# EAGLE board illumi-leddriver (EAGLE 6.2)
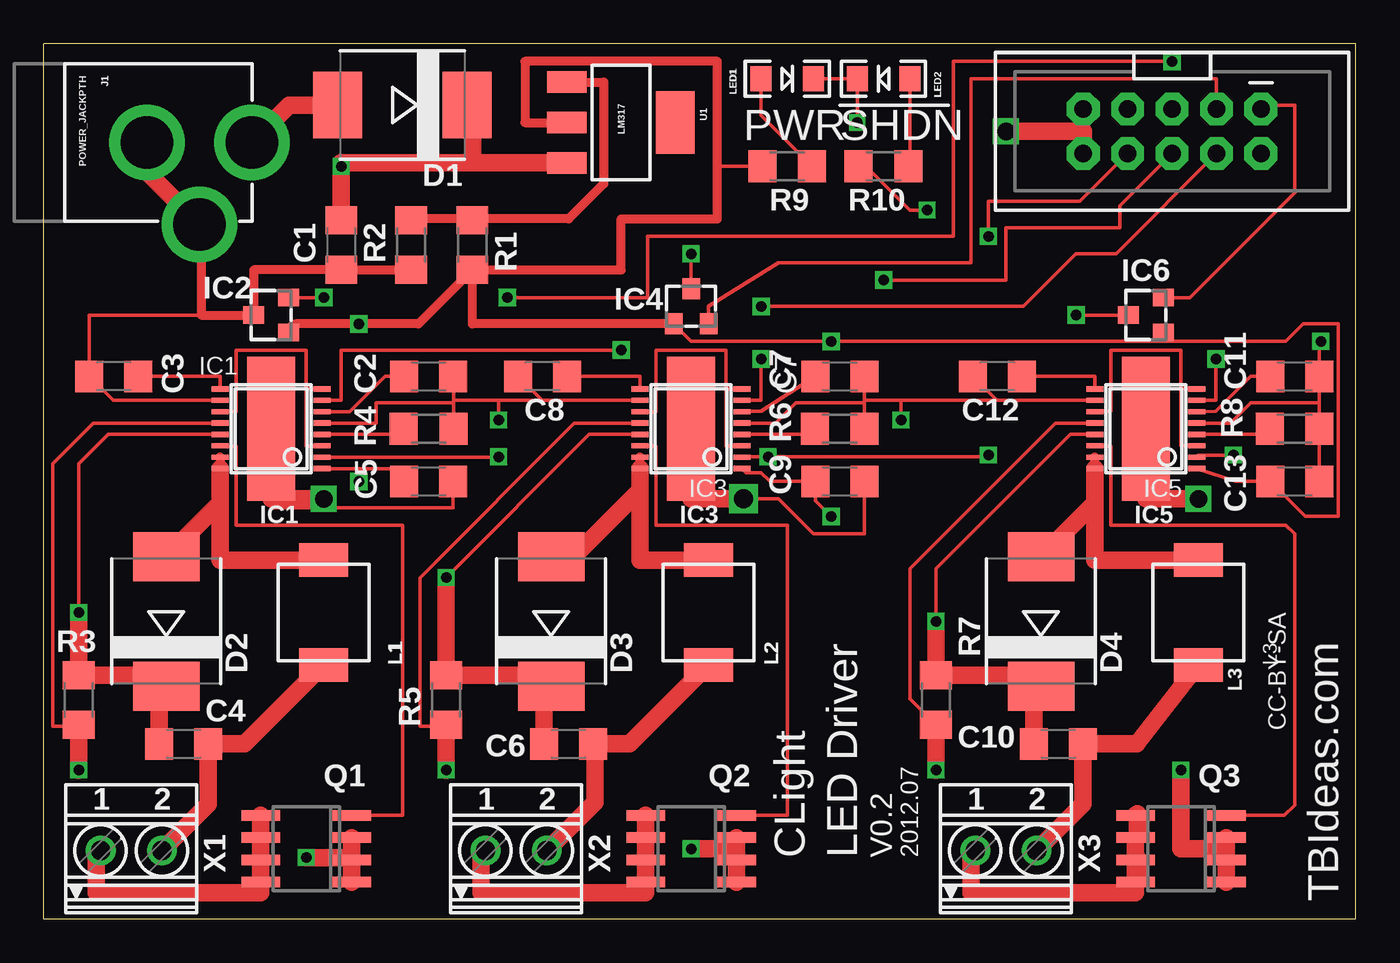
[diagram p0: board, top side]
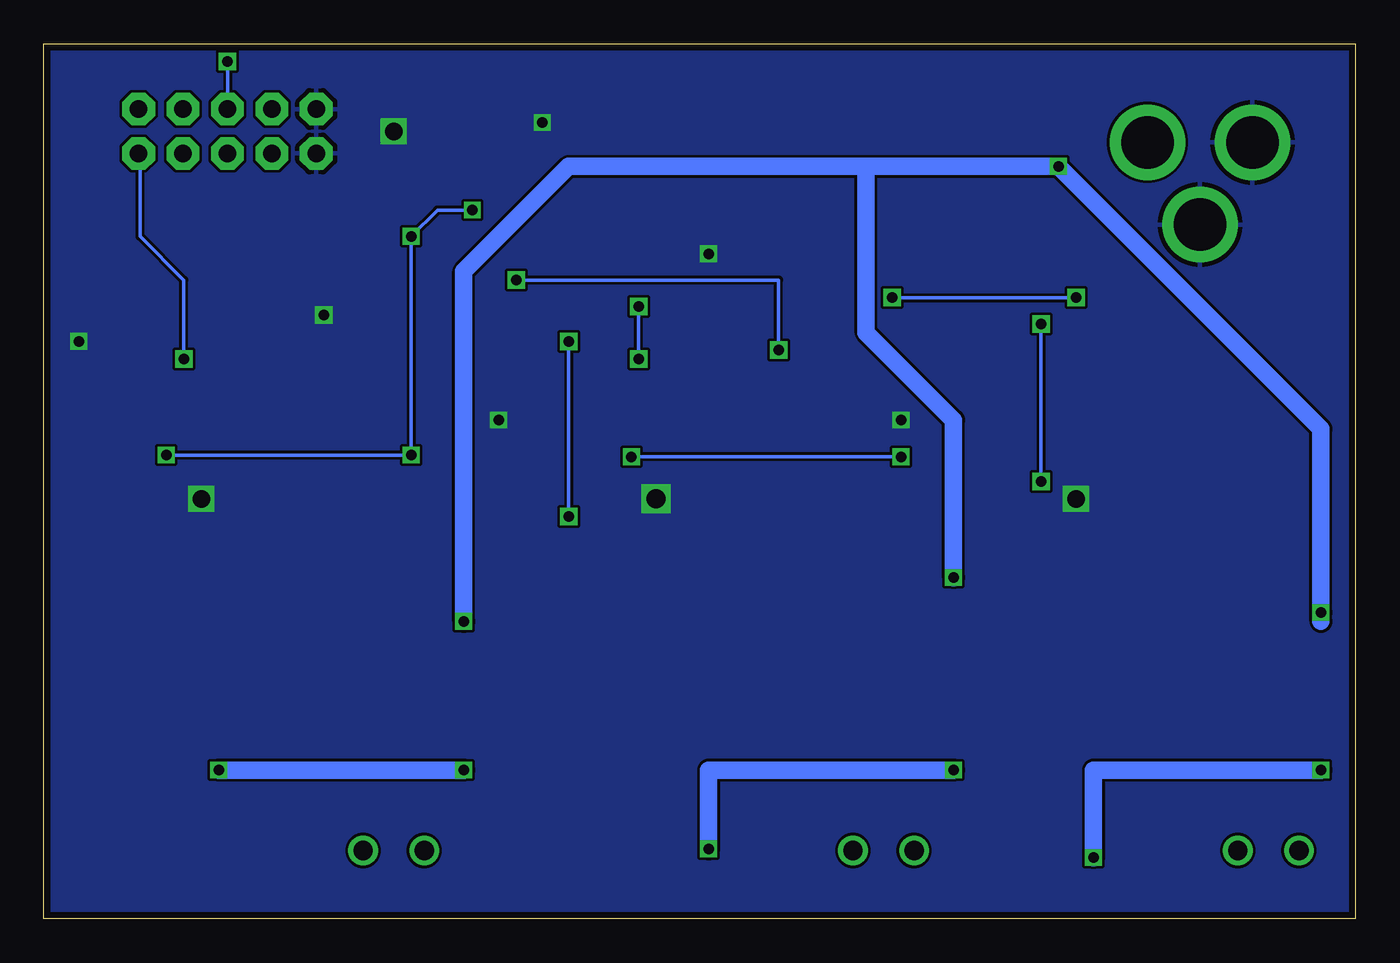
[diagram p1: board, bottom side, seen from below]

Size 75 x 50 mm. Coordinates in mm from the lower left corner, seen from the top.
Outline: 0,0 75,0 75,50 0,50 0,0
Copper layers (1*16): Top 0.0356mm / dielectric 1.5011mm / Bottom 0.0356mm
Design rules: minimum track width 6mil, minimum drill 13mil, track to track 6mil, track to pad 6mil, pad to pad 6mil, via to via 6mil, smd to smd 6mil, copper to edge 15mil, drill to drill 6mil, minimum pad ring 7mil, minimum via ring 7mil, stop-mask expansion 4mil, vias tented up to drill 0mil, thermal gap 10mil

## Footprints (pad centres in the part's own frame; a part is rotated, then mirrored left to right if it is on the bottom)
C1206 = smd 1.6 x 1.8: 1 -1.4,0; 2 1.4,0
SMC = smd 2.8 x 3.8: A 3.7,0; C -3.7,0
TSSOP16-EXPOSED_PAD_LARGE = smd 0.305 x 0.991: 1 -2.275,-2.918; 2 -1.625,-2.918; 3 -0.975,-2.918; 4 -0.325,-2.918; 5 0.325,-2.918; 6 0.975,-2.918; 7 1.625,-2.918; 8 2.275,-2.918; 9 2.275,2.918; 10 1.625,2.918; 11 0.975,2.918; 12 0.325,2.918; 13 -0.325,2.918; 14 -0.975,2.918; 15 -1.625,2.918; 16 -2.275,2.918 | smd 8.22 x 2.74: GND 0,0
SOT-23B = smd 1 x 1.2: 1 -1,-1; 2 1,-1; 3 0,1
POWER_JACK_PTH = drill 2.997 pad 4.318: GND 0,7.7; GNDBREAK 4.7,10.7; PWR 0,13.7
2X5-SHROUDED = drill 1.016 pad 1.88 octagon: 1 -1.27,5.08; 2 1.27,5.08; 3 -1.27,2.54; 4 1.27,2.54; 5 -1.27,0; 6 1.27,0; 7 -1.27,-2.54; 8 1.27,-2.54; 9 -1.27,-5.08; 10 1.27,-5.08
L2020 = smd 1.915 x 2.79: P$1 2.995,0; P$2 -2.995,0
LED-1206 = smd 1.2 x 1.4: A -1.5,0; C 1.5,0
SO-08 = smd 0.6 x 2.2: 1 -1.905,-2.6; 2 -0.635,-2.6; 3 0.635,-2.6; 4 1.905,-2.6; 5 1.905,2.6; 6 0.635,2.6; 7 -0.635,2.6; 8 -1.905,2.6
R1206 = smd 1.6 x 1.803: 1 -1.422,0; 2 1.422,0
SOT223 = smd 1.219 x 2.235: 1 -2.311,-3.099; 2 0,-3.099; 3 2.311,-3.099 | smd 3.6 x 2.2: 4 0,3.099
1751248 = drill 1.1 pad 1.7: 1 -1.75,-0.1; 2 1.75,-0.1

## Placement (x,y rotation side)
C1  0.1uF  [C1206]  17,38.5 270 top
C2  0.1uF  [C1206]  22,31 0 top
C3  0.1uF  [C1206]  4,31 180 top
C4  10uF  [C1206]  8,10 0 top
C5  2.2uF  [C1206]  22,25 0 top
C6  10uF  [C1206]  30,10 0 top
C7  0.1uF  [C1206]  45.5,31 0 top
C8  0.1uF  [C1206]  28.5,31 180 top
C9  2.2uF  [C1206]  45.5,25 0 top
C10  10uF  [C1206]  58,10 0 top
C11  0.1uF  [C1206]  71.5,31 0 top
C12  0.1uF  [C1206]  54.5,31 180 top
C13  2.2uF  [C1206]  71.5,25 0 top
D1  50V-8A  [SMC]  20.5,46.5 180 top
D2  MBRS360T3  [SMC]  7,17 90 top
D3  MBRS360T3  [SMC]  29,17 90 top
D4  MBRS360T3  [SMC]  57,17 90 top
IC1  LT3518TSSOP16-EXPOSED-PAD-LARGE  [TSSOP16-EXPOSED_PAD_LARGE]  13,28 90 top
IC2  TC1047  [SOT-23B]  13,34.5 90 top
IC3  LT3518TSSOP16-EXPOSED-PAD-LARGE  [TSSOP16-EXPOSED_PAD_LARGE]  37,28 90 top
IC4  TC1047  [SOT-23B]  37,35 0 top
IC5  LT3518TSSOP16-EXPOSED-PAD-LARGE  [TSSOP16-EXPOSED_PAD_LARGE]  63,28 90 top
IC6  TC1047  [SOT-23B]  63,34.5 90 top
J1  POWER_JACKPTH  [POWER_JACK_PTH]  -1.79,44.37 270 top
JP1  M05X2SHD  [2X5-SHROUDED]  64.5,45 270 top
L1  15uH  [L2020]  16,17.5 90 top
L2  15uH  [L2020]  38,17.5 90 top
L3  15uH  [L2020]  66,17.5 90 top
LED1  Green  [LED-1206]  42.5,48 0 top
LED2  red  [LED-1206]  48,48 180 top
Q1  FDS4685  [SO-08]  15,4 90 top
Q2  FDS4685  [SO-08]  37,4 90 top
Q3  FDS4685  [SO-08]  65,4 90 top
R1  240  [R1206]  24.5,38.5 270 top
R2  390  [R1206]  21,38.5 90 top
R3  143mO  [R1206]  2,12.5 270 top
R4  16.9kO  [R1206]  22,28 180 top
R5  143mO  [R1206]  23,12.5 270 top
R6  16.9kO  [R1206]  45.5,28 180 top
R7  143mO  [R1206]  51,12.5 270 top
R8  16.9kO  [R1206]  71.5,28 180 top
R9  220  [R1206]  42.5,43 180 top
R10  220  [R1206]  48,43 180 top
U1  LM317  [SOT223]  33,45.5 270 top
X1  1751248  [1751248]  5,4 0 top
X2  1751248  [1751248]  27,4 0 top
X3  1751248  [1751248]  55,4 0 top

## Library data of the parts
C1-C13 R1-R10 = rcl
D1-D4 = diode
IC1 IC3 IC5 = lt3518
IC2 IC4 IC6 = tc1047
J1 JP1 LED1 LED2 U1 = SparkFun
L1-L3 = l2020
Q1-Q3 = transistor-power
X1-X3 = con-phoenix-350; OC_FARNELL: unknown; OC_NEWARK: unknown

## Nets
3.3V: C5.1 C9.1 C13.1 IC1.1 IC2.1 IC3.1 IC4.1 IC5.1 IC6.1 R1.2 R9.2 U1.2
BLUEPWM: IC5.7 JP1.2
BLUETEMP: IC6.2 JP1.1
GND: C1.2 C2.2 C3.2 C5.2 C7.2 C8.2 C9.2 C11.2 C12.2 C13.2 IC1.5 IC1.10 IC1.GND IC2.3 IC3.5 IC3.10 IC3.GND IC4.3 IC5.5 IC5.10 IC5.GND IC6.3 J1.GND J1.GNDBREAK JP1.9 JP1.10 LED1.C LED2.C R2.1 R4.1 R6.1 R8.1
GREENPWM: IC3.7 JP1.4
GREENTEMP: IC4.2 JP1.3
N$1: IC1.3 IC1.8 IC1.11
N$2: IC3.3 IC3.8 IC3.11
N$3: R1.1 R2.2 U1.1
N$4: IC3.12 Q2.1 Q2.2 Q2.3 R5.2
N$5: IC1.12 Q1.1 Q1.2 Q1.3 R3.2
N$6: IC1.14 Q1.4
N$7: Q1.5 Q1.6 Q1.7 Q1.8 X1.1
N$8: C4.2 L1.P$2 X1.2
N$9: D2.A IC1.15 IC1.16 L1.P$1
N$10: IC3.14 Q2.4
N$11: IC1.4 R4.2
N$12: Q2.5 Q2.6 Q2.7 Q2.8 X2.1
N$13: C6.2 L2.P$2 X2.2
N$14: D3.A IC3.15 IC3.16 L2.P$1
N$15: C2.1 IC1.6
N$16: C3.1 IC1.9
N$17: IC3.4 R6.2
N$18: C7.1 IC3.6
N$19: C8.1 IC3.9
N$20: IC5.3 IC5.8 IC5.11
N$21: IC5.12 Q3.1 Q3.2 Q3.3 R7.2
N$22: IC5.14 Q3.4
N$23: Q3.5 Q3.6 Q3.7 Q3.8 X3.1
N$24: C10.2 L3.P$2 X3.2
N$25: D4.A IC5.15 IC5.16 L3.P$1
N$26: IC5.4 R8.2
N$27: C11.1 IC5.6
N$28: C12.1 IC5.9
N$29: D1.A J1.PWR
N$31: LED1.A R9.1
N$34: LED2.A R10.1
REDPWM: IC1.7 JP1.6
REDTEMP: IC2.2 JP1.5
SHDN: IC1.2 IC3.2 IC5.2 JP1.8 R10.2
VIN: C1.1 C4.1 C6.1 C10.1 D1.C D2.C D3.C D4.C IC1.13 IC3.13 IC5.13 R3.1 R5.1 R7.1 U1.3

## Tracks (layer width: path | path; a pad name or v marks a point on that pad's centre or on a via)
3.3V  (via drill 0.6 pad 1)
  Top 0.2: C5.1 19.88,25.73 18,25.73 | 18,25.73 IC1.1 | IC3.1 40.14,25.5 41,25.5 41.5,25 C9.1 44.1,23.9 v45,23 | IC6.1 63.5,33 | 63.5,33 v45,33 37,33 IC4.1 | IC5.1 68.14,25 C13.1 72.1,23 74,23 74,34 72,34 71,33 63.5,33 | IC2.1 14.5,34 | v18,25 18,25.73 | R9.2 38.5,43
  Top 0.5: R1.2 21.42,34 v18,34 14.5,34 arc90 IC2.1 | R1.2 33,37.08 33,40 38.5,40 38.5,43 38.5,49 27.5,49 27.5,45.5 U1.2 | IC4.1 24.5,34 R1.2
  Bottom 0.2: v45,33 v45,23 | v18,34 v18,25
BLUEPWM  (via drill 0.6 pad 1)
  Top 0.2: IC5.7 67,29.62 v67,32
  Bottom 0.2: v67,32 67,36.5 69.5,39 69.5,43.65 JP1.2
BLUETEMP
  Top 0.2: IC6.2 65.5,35.5 71.5,41.5 71.5,46.5 69.81,46.5 JP1.1
GND  (via drill 0.6, 0.6 pad 1, 1, 1.1 pad 1)
  Top 0.2: C5.2 23.4,23.5 13,23.5 IC1.GND | R4.1 23.42,29.5 | 23.42,29.62 23.42,31 C2.2 | IC1.5 19,28.32 19,29.5 23.42,29.5 | C13.2 72.9,27.98 R8.1 72.9,28.02 72.9,29.5 | IC5.5 67.83,28.32 69,29.5 72.9,29.5 | IC1.10 3.98,29.62 C3.2 2.6,34.5 9,34.5 | C8.2 28.48,29.62 IC3.10 26,29.62 | C12.2 54.48,29.62 IC5.10 | C7.2 46.92,30.98 46.92,29.62 | 46.92,29.5 R6.1 | IC3.5 41.83,28.32 43,29.5 46.92,29.5 | 26,29.62 23.42,29.62 | 23.42,29.62 23.42,29.5 | IC5.10 46.92,29.62 | 46.92,29.62 46.92,29.5 | 72.9,29.5 C11.2 72.9,33 v73,33 | IC4.3 v37,38 | v26,28.5 26,29.62 | IC5.10 49,29.62 v49,28.5 | C9.2 46.9,22 44,22 42,24 v40,24 | IC6.3 v59,34.5 | v46.5,45.5 LED2.C LED1.C
  Top 0.5: 17.02,37.08 C1.2 17,37.08 | J1.GNDBREAK 9,39.57 9,34.5 IC2.3 12,37.08 17,37.08 | JP1.9 JP1.10 | 17,37.08 R2.1
  Top 1: J1.GND 5.91,42.67 J1.GNDBREAK | JP1.10 59.42,45 v55,45 | v66,24 63,24 IC5.GND | v16,24 13,24 IC1.GND | IC3.GND 37,24 v40,24
  pour Bottom: 0,50 75,50 75,-0.1 0,0
GREENPWM  (via drill 0.6 pad 1)
  Top 0.2: IC3.7 41,29.62 v41,32 | v41,35 56,35 59,38 61.31,38 JP1.4
  Bottom 0.2: v41,32 v41,35
GREENTEMP
  Top 0.2: IC4.2 38,35 42,37.5 53,37.5 53,48 67.04,48 JP1.3
N$1
  Top 0.2: IC1.11 11,28.98 11,32.5 15,32.5 15,30.5 15,30.27 | 15,30.27 15,27 15.92,27 IC1.3 | IC1.8 15,30.27
N$2
  Top 0.2: IC3.8 39,30.27 | 39,30.27 39,27 39.92,27 IC3.3 | IC3.11 35,28.98 35,32.5 39,32.5 39,30.27
N$3
  Top 0.5: U1.1 32,47.81 32,42 30,40 24.5,40 | 24.5,40 R1.1 | 24.5,40 21.08,40 R2.2
N$4  (via drill 0.6)
  Top 0.2: IC3.12 30.32,28.32 21.5,19.5 21.5,11 22.92,11 R5.2
  Top 1: Q2.3 39.6,4 | 39.6,4 Q2.2 Q2.1 | R5.2 v23,8.5 | v37,4 39.6,4
  Bottom 1: v23,8.5 37,8.5 v37,4
N$5  (via drill 0.6)
  Top 0.2: R3.2 1.92,11 0.5,11 0.5,26 2.83,28.32 IC1.12
  Top 1: Q1.1 Q1.2 | Q1.2 Q1.3 | R3.2 v2,8.5 | v15,3.5 17.6,3.5 Q1.2
  Bottom 1: v2,8.5 15,8.5 v15,3.5
N$6
  Top 0.2: IC1.14 10.11,27 11,27 11,22.5 20.5,22.5 20.5,5.91 Q1.4
N$7
  Top 1: Q1.5 Q1.6 | Q1.6 Q1.7 Q1.8 | Q1.6 12.4,1.5 3,1.5 3,3.9 X1.1
N$8
  Top 1: L1.P$2 11.49,10 C4.2 9.4,6.55 X1.2
N$9
  Top 0.5: IC1.15 IC1.16
  Top 1: IC1.16 10.08,23.78 | 10.08,23.78 D2.A | 10.08,23.78 10.08,20.5 L1.P$1
N$10
  Top 0.2: IC3.14 34.08,27 35,27 35,22.5 42.5,22.5 42.5,5.91 Q2.4
N$11
  Top 0.2: R4.2 20.25,27.68 IC1.4
N$12
  Top 1: Q2.5 Q2.6 | Q2.6 Q2.7 Q2.8 | Q2.6 34.4,1.5 25,1.5 25,3.9 X2.1
N$13
  Top 1: L2.P$2 33.49,10 C6.2 31.4,9.6 arc90 31.5,9.5 31.5,6.65 X2.2
N$14
  Top 0.5: IC3.16 IC3.15
  Top 1: IC3.16 34.08,24.5 | 34.08,24.5 34.08,20.5 L2.P$1 | D3.A 30.28,20.7 34.08,24.5
N$15
  Top 0.2: IC1.6 17.48,28.98 19.5,31 C2.1
N$16
  Top 0.2: C3.1 10.08,31 IC1.9
N$17
  Top 0.2: R6.2 43.75,27.68 IC3.4
N$18
  Top 0.2: C7.1 41,29 39.92,29 IC3.6
N$19
  Top 0.2: C8.1 34.08,31 IC3.9
N$20
  Top 0.2: IC5.11 60.08,29 61,29 61,32.5 65,32.5 65,30.27 | IC5.3 65,27.02 65,30 65,30.27 | IC5.8 65,30.27
N$21  (via drill 0.6)
  Top 0.2: R7.2 49.5,12.58 49.5,20 57.83,28.32 IC5.12
  Top 1: Q3.1 Q3.2 67.6,4 | Q3.3 67.6,4 | R7.2 v51,8.5 | v65,8.5 65,4 67.6,4
  Bottom 1: v51,8.5 v65,8.5
N$22
  Top 0.2: IC5.14 60.11,27 61,27 61,22.5 71,22.5 71.5,22 71.5,6.5 70.91,5.91 Q3.4
N$23
  Top 1: Q3.5 62.5,6 62.5,4.74 Q3.6 | Q3.6 Q3.7 62.4,3.4 62.5,3.5 62.5,2.19 Q3.8 | Q3.6 62.4,1.5 53,1.5 53,3.9 X3.1
N$24
  Top 1: X3.2 59.4,6.55 C10.2 62.49,10 L3.P$2
N$25
  Top 0.5: IC5.16 IC5.15
  Top 1: L3.P$1 60.08,20.5 IC5.16 60.08,23.78 D4.A
N$26
  Top 0.2: IC5.4 69.75,27.68 arc90 R8.2
N$27
  Top 0.2: IC5.6 67,29 69,31 C11.1
N$28
  Top 0.2: IC5.9 60.08,31 C12.1
N$29
  Top 1: J1.PWR 14.04,46.5 D1.A
N$31
  Top 0.2: LED1.A 41,45.92 R9.1
N$34
  Top 0.2: LED2.A 49.5,43.08 R10.1
REDPWM  (via drill 0.6 pad 1)
  Top 0.2: IC1.7 17,29.62 17,32.5 v33,32.5 | v48,36.5 55,36.5 55,39.5 61.5,39.5 61.5,40.73 JP1.6
  Bottom 0.2: v33,32.5 33,36.5 v48,36.5
REDTEMP  (via drill 0.6 pad 1)
  Top 0.2: v64.5,49 52,49 52,39 34.5,39 34.5,35.5 v26.5,35.5 | v16,35.5 IC2.2
  Bottom 0.2: v26.5,35.5 v16,35.5 | v64.5,49 JP1.5
SHDN  (via drill 0.6)
  Top 0.2: IC1.2 25.98,26.38 arc90 v26,26.4 | IC3.2 arc-90 39.94,26.4 v41.41,26.4 53.9,26.4 v54,26.5 | v68,26.5 66.04,26.5 arc90 IC5.2 | JP1.8 59.23,41 54,41 v54,39 | R10.2 47,43 49.5,40.5 v50.5,40.5
  Bottom 0.2: v26,26.4 v41.41,26.4 | v68,26.5 v54,26.5 v54,39 52.5,40.5 v50.5,40.5
VIN  (via drill 0.6)
  Top 0.2: R5.1 23,14 | v23,19.5 31.18,27.68 IC3.13 | IC1.13 3.67,27.68 2,26 v2,17.5 | R7.1 51,14 | IC5.13 58.67,27.68 51,20 v51,17
  Top 1: C4.1 6.6,12.9 arc-90 D2.C 7,13.92 R3.1 v2,17.5 | C6.1 28.6,12.9 D3.C arc90 28.38,13.92 R5.1 | R7.1 56.38,13.92 arc-90 D4.C 56.6,13.3 C10.1 | 24.5,43.19 17,43.19 v17,43 C1.1 | 24.5,43.19 U1.3 | 23,14 v23,19.5 | 51,14 v51,17 | D1.C 24.5,46.2 24.5,43.19
  Bottom 1: 2,17 v2,17.5 2,28 v17,43 28,43 | v51,17 51,37 45,43 28,43 | v23,19.5 23,28.5 28,33.5 28,43

## Text on the board
_tsilk: POWER_JACKPTH | J1 | LED2 | LM317 | LED1 | U1 | PWR | SHDN | D1 | R9 | R10 | C1 | R2 | R1 | IC6 | IC2 | IC4 | C3 | C2 | C8 | C7 | C12 | R8 | C11 | R4 | R6 | C5 | IC1 | IC3 | C9 | IC5 | C13 | CC-BY-SA | R7 | R3 | D2 | L1 | D3 | L2 | D4 | R5 | L3 | C4 | C10 | Q1 | C6 | Q2 | Q3 | 1 | 2 | 1 | 2 | 1 | 2 | CLight | LED Driver | V0.2 | 2012.07 | X1 | X2 | X3 | TBIdeas.com